# EAGLE board SX-Belegtmelder V01.00 (EAGLE 7.2.0)
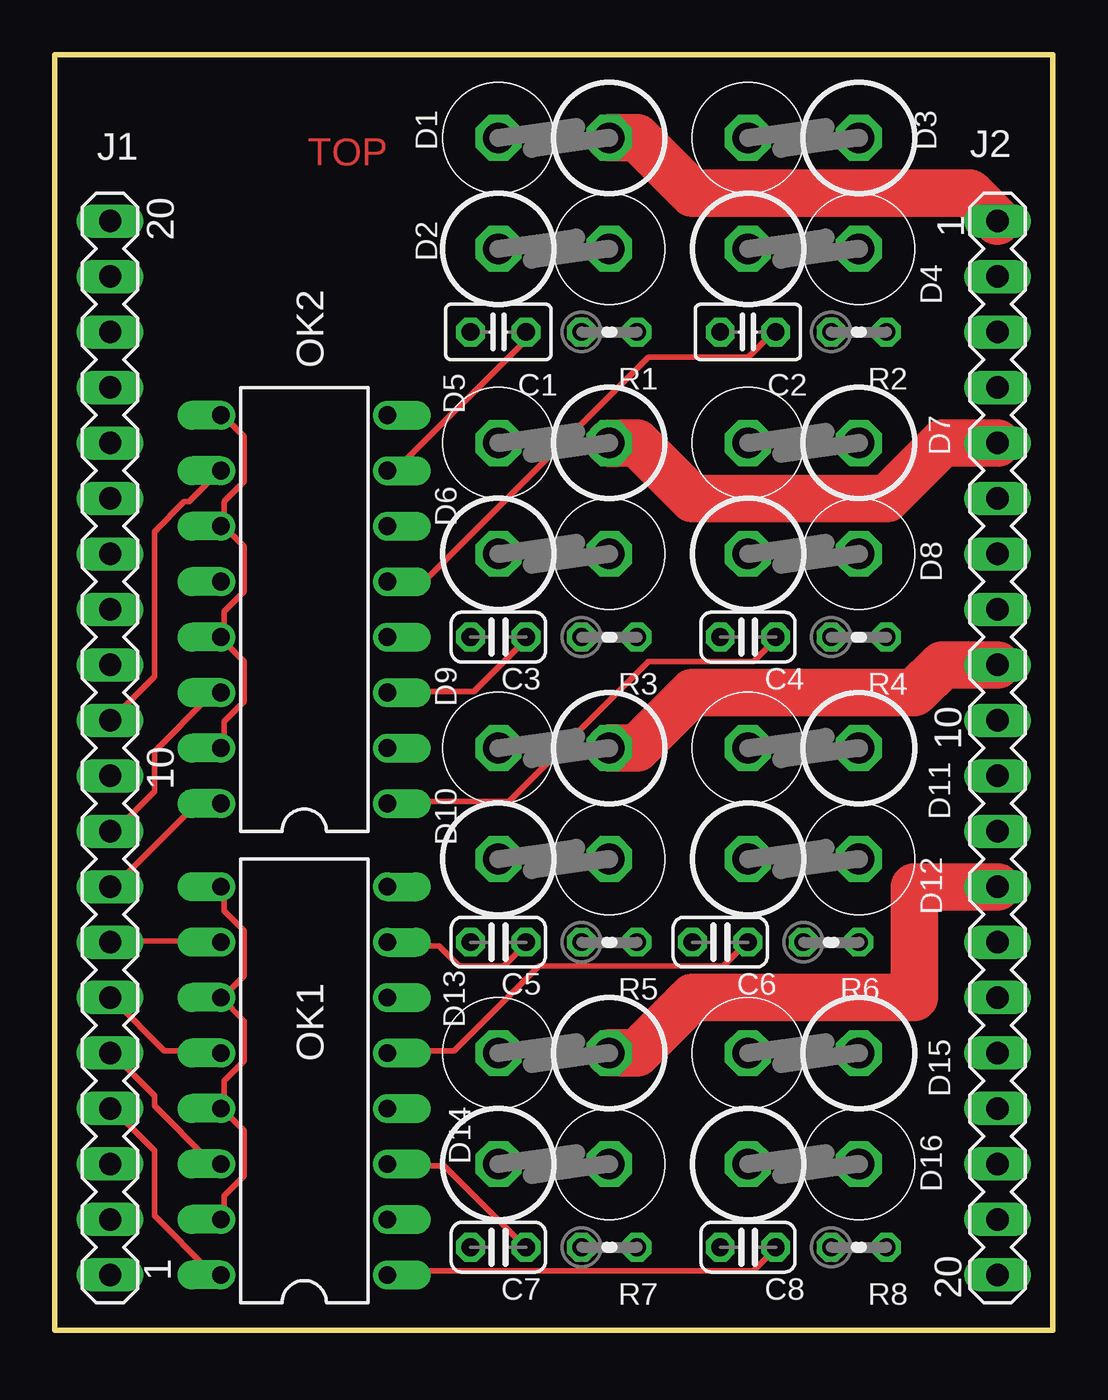
[diagram p0: board, top side]
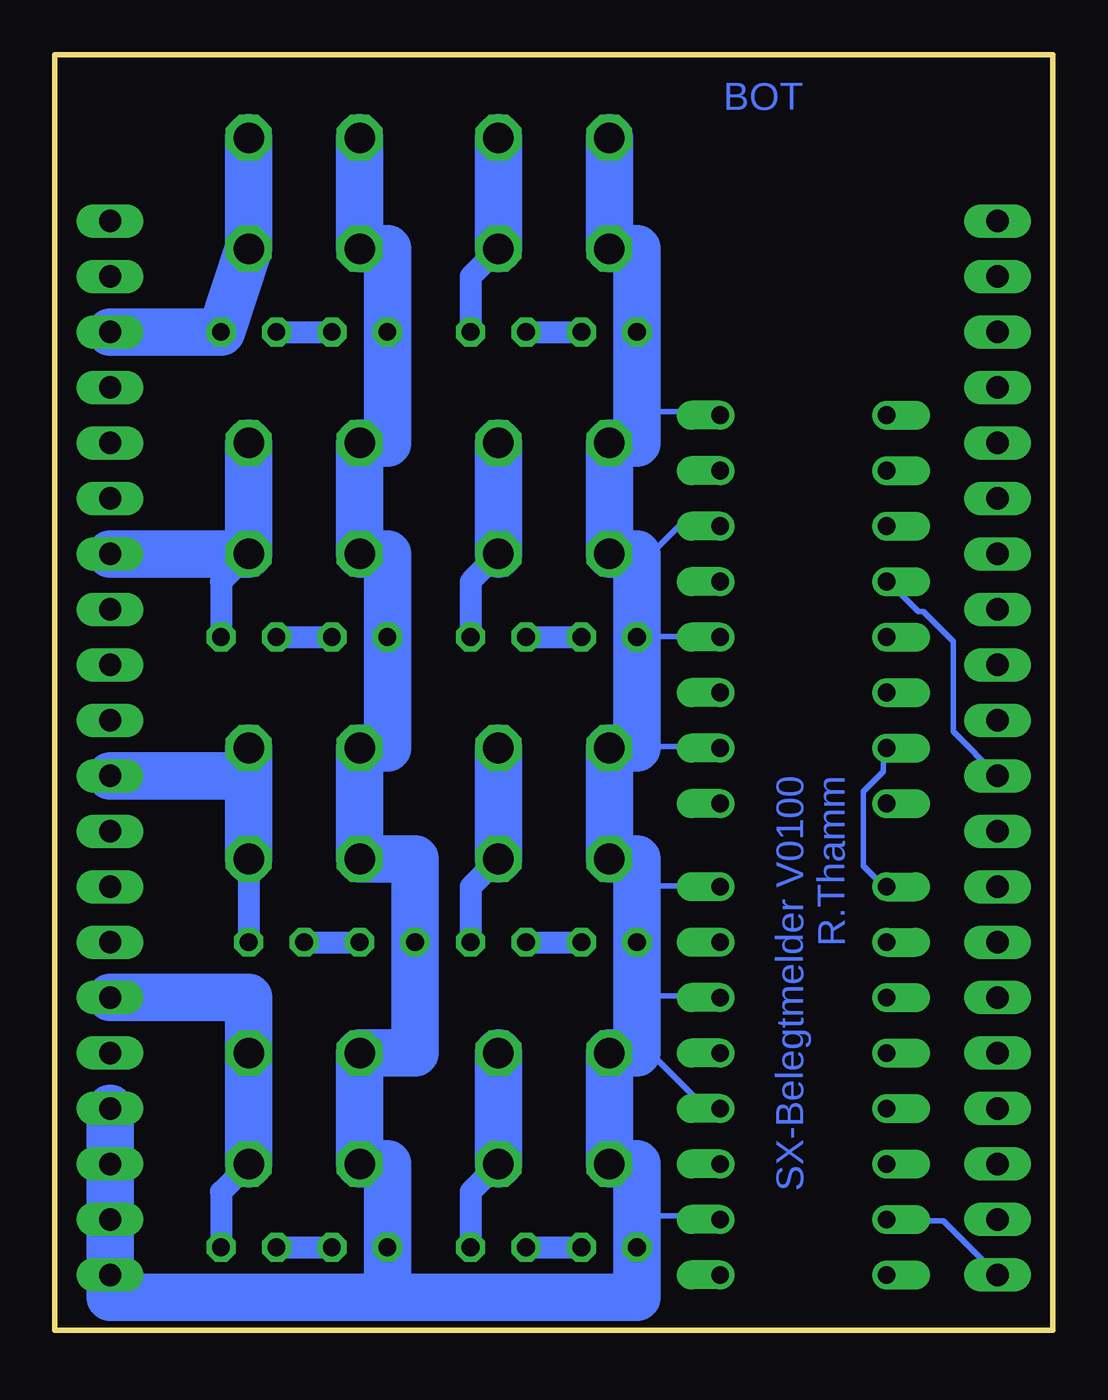
[diagram p1: board, bottom side, seen from below]

Size 45.72 x 58.42 mm. Coordinates in mm from the lower left corner, seen from the top.
Outline: 0,0 45.72,0 45.72,58.42 0,58.42 0,0
Copper layers (1*16): Top 0.035mm / dielectric 1.5mm / Bottom 0.035mm
Design rules "Elecrow_2-layer_eagle_rule": minimum track width 6mil, minimum drill 12mil, track to track 6mil, track to pad 6mil, pad to pad 6mil, via to via 6mil, smd to smd 0mil, copper to edge 10mil, drill to drill 10mil, minimum pad ring 10mil, minimum via ring 6mil, stop-mask expansion 2mil, vias tented up to drill 100mil, thermal gap 10mil

## Footprints (pad centres in the part's own frame; a part is rotated, then mirrored left to right if it is on the bottom)
C025-025X050 = drill 0.813 octagon: 1 -1.27,0; 2 1.27,0
C025-024X044 = drill 0.813 octagon: 1 -1.27,0; 2 1.27,0
TWIN-DIODE = drill 1.4 octagon: A -2.54,0; C 2.54,0
MA20-1 = drill 1.016 long: 1 -24.13,0; 2 -21.59,0; 3 -19.05,0; 4 -16.51,0; 5 -13.97,0; 6 -11.43,0; 7 -8.89,0; 8 -6.35,0; 9 -3.81,0; 10 -1.27,0; 11 1.27,0; 12 3.81,0; 13 6.35,0; 14 8.89,0; 15 11.43,0; 16 13.97,0; 17 16.51,0; 18 19.05,0; 19 21.59,0; 20 24.13,0
DIL16 = drill 0.813 offset: 1 -8.89,-3.81; 2 -6.35,-3.81; 3 -3.81,-3.81; 4 -1.27,-3.81; 5 1.27,-3.81; 6 3.81,-3.81; 7 6.35,-3.81; 8 8.89,-3.81; 9 8.89,3.81; 10 6.35,3.81; 11 3.81,3.81; 12 1.27,3.81; 13 -1.27,3.81; 14 -3.81,3.81; 15 -6.35,3.81; 16 -8.89,3.81
0204V = drill 0.813 octagon: 1 -1.27,0; 2 1.27,0

## Placement (x,y rotation side)
C1  100n  [C025-025X050]  20.32,45.72 0 top
C2  100n  [C025-025X050]  31.75,45.72 0 top
C3  100n  [C025-024X044]  20.32,31.75 0 top
C4  100n  [C025-024X044]  31.75,31.75 0 top
C5  100n  [C025-024X044]  20.32,17.78 0 top
C6  100n  [C025-024X044]  30.48,17.78 0 top
C7  100n  [C025-024X044]  20.32,3.81 0 top
C8  100n  [C025-024X044]  31.75,3.81 0 top
D1  2*1N5405  [TWIN-DIODE]  22.86,54.61 180 top
D2  2*1N5405  [TWIN-DIODE]  22.86,49.53 0 top
D3  2*1N5405  [TWIN-DIODE]  34.29,54.61 180 top
D4  2*1N5405  [TWIN-DIODE]  34.29,49.53 0 top
D5  2*1N5405  [TWIN-DIODE]  22.86,40.64 180 top
D6  2*1N5405  [TWIN-DIODE]  22.86,35.56 0 top
D7  2*1N5405  [TWIN-DIODE]  34.29,40.64 180 top
D8  2*1N5405  [TWIN-DIODE]  34.29,35.56 0 top
D9  2*1N5405  [TWIN-DIODE]  22.86,26.67 180 top
D10  2*1N5405  [TWIN-DIODE]  22.86,21.59 0 top
D11  2*1N5405  [TWIN-DIODE]  34.29,26.67 180 top
D12  2*1N5405  [TWIN-DIODE]  34.29,21.59 0 top
D13  2*1N5405  [TWIN-DIODE]  22.86,12.7 180 top
D14  2*1N5405  [TWIN-DIODE]  22.86,7.62 0 top
D15  2*1N5405  [TWIN-DIODE]  34.29,12.7 180 top
D16  2*1N5405  [TWIN-DIODE]  34.29,7.62 0 top
J1  [MA20-1]  2.54,26.67 90 top
J2  [MA20-1]  43.18,26.67 270 top
OK1  LTV844  [DIL16]  11.43,11.43 90 top
OK2  LTV844  [DIL16]  11.43,33.02 90 top
R1  33  [0204V]  25.4,45.72 0 top
R2  33  [0204V]  36.83,45.72 0 top
R3  33  [0204V]  25.4,31.75 0 top
R4  33  [0204V]  36.83,31.75 0 top
R5  33  [0204V]  25.4,17.78 0 top
R6  33  [0204V]  35.56,17.78 0 top
R7  33  [0204V]  25.4,3.81 0 top
R8  33  [0204V]  36.83,3.81 0 top

## Library data of the parts
C1-C8 R1-R8 = rcl
D1-D16 = diode-twin_Tha
J1 J2 = con-lstb; OC_FARNELL: unknown; OC_NEWARK: unknown
OK1 OK2 = optocoupler; MF: VISHAY/TELEFUNKEN; MPN: ILQ620; OC_FARNELL: 1612470; OC_NEWARK: 58K1694

## Nets
N$1: D1.A D2.C J2.1 R1.2
N$2: D3.A D4.C J2.3 R2.2
N$3: D5.A D6.C J2.5 R3.2
N$4: D7.A D8.C J2.7 R4.2
N$5: D9.A D10.C J2.9 R5.2
N$6: D11.A D12.C J2.11 R6.2
N$7: D13.A D14.C J2.13 R7.2
N$8: D15.A D16.C J2.15 R8.2
N$9: C1.1 C2.1 C3.1 C4.1 C5.1 C6.1 C7.1 C8.1 D1.C D2.A D3.C D4.A D5.C D6.A D7.C D8.A D9.C D10.A D11.C D12.A D13.C D14.A D15.C D16.A J2.17 J2.18 J2.19 J2.20 OK1.2 OK1.4 OK1.6 OK1.8 OK2.2 OK2.4 OK2.6 OK2.8
N$10: J1.4 OK1.16
N$11: J1.5 OK1.14
N$12: J1.6 OK1.12
N$13: J1.7 OK1.10
N$14: J1.8 OK2.16
N$15: J1.9 OK2.14
N$16: J1.10 OK2.12
N$17: C1.2 OK2.7 R1.1
N$18: C2.2 OK2.5 R2.1
N$19: C3.2 OK2.3 R3.1
N$20: C4.2 OK2.1 R4.1
N$21: C5.2 OK1.7 R5.1
N$22: C6.2 OK1.5 R6.1
N$23: C7.2 OK1.3 R7.1
N$24: C8.2 OK1.1 R8.1
N$25: J1.11 OK2.10
N$34: J1.1 OK1.9 OK1.11 OK1.13 OK1.15 OK2.9 OK2.11 OK2.13 OK2.15

## Tracks (layer width: path | path; a pad name or v marks a point on that pad's centre or on a via)
N$1
  Top 2.184: J2.1 41.91,52.07 29.21,52.07 26.67,54.61 D1.A
  Bottom 1.016: D2.C 26.67,48.26 R1.2
  Bottom 2.184: D2.C D1.A
N$2
  Bottom 2.184: D3.A D4.C R2.2 J2.3
N$3
  Top 2.184: J2.5 40.64,40.64 38.1,38.1 29.21,38.1 26.67,40.64 D5.A
  Bottom 1.016: D6.C 26.67,34.29 R3.2
  Bottom 2.184: D6.C D5.A
N$4
  Bottom 1.016: D8.C 38.1,34.29 R4.2
  Bottom 2.184: D7.A D8.C J2.7
N$5
  Top 2.184: J2.9 40.64,30.48 39.37,29.21 29.21,29.21 26.67,26.67 D9.A
  Bottom 1.016: D10.C 26.67,20.32 R5.2
  Bottom 2.184: D9.A D10.C
N$6
  Bottom 1.016: D12.C R6.2
  Bottom 2.184: D12.C D11.A 36.83,25.4 J2.11
N$7
  Top 2.184: J2.13 39.37,20.32 39.37,15.24 29.21,15.24 26.67,12.7 D13.A
  Bottom 1.016: D14.C 26.67,6.35 R7.2
  Bottom 2.184: D13.A D14.C
N$8
  Bottom 1.016: D16.C 38.1,6.35 R8.2
  Bottom 2.184: D16.C D15.A 36.83,15.24 J2.15
N$9
  Bottom 0.254: 19.05,5.26 15.32,5.26 OK1.2 | OK1.4 15.32,10.29 16,10.29 18.06,12.34 19.05,12.7 | 19.05,15.32 15.32,15.32 OK1.6 | 19.05,20.34 15.32,20.34 OK1.8 | OK2.2 15.32,26.75 18.06,26.75 19.05,26.67 | OK2.4 15.32,31.77 18.06,31.77 C3.1 | OK2.6 15.32,36.8 17.14,36.8 18.06,35.89 19.05,35.56 | 19.05,42.06 15.32,42.06 OK2.8
  Bottom 2.184: D3.C D4.A 30.48,49.53 C2.1 30.48,40.64 D7.C D8.A 30.48,35.56 C4.1 30.48,26.67 D11.C D12.A 29.21,21.59 C6.1 29.21,12.7 D15.C D16.A 30.48,7.62 C8.1 30.48,1.52 | D1.C D2.A 19.05,49.53 C1.1 19.05,42.06 19.05,40.64 D5.C D6.A 19.05,35.56 C3.1 19.05,26.67 D9.C D10.A 19.05,21.59 19.05,20.34 C5.1 19.05,15.32 19.05,12.7 D13.C D14.A 19.05,7.62 19.05,5.26 C7.1 19.05,1.52 30.48,1.52 | J2.17 J2.18 | J2.18 J2.19 J2.20 | J2.18 43.18,1.52 30.48,1.52
N$10
  Top 0.254: OK1.16 7.54,2.74 7.09,2.74 4.57,5.26 4.57,8.23 2.74,10.06 J1.4
N$11
  Top 0.254: OK1.14 7.54,7.77 7.09,7.77 4.57,10.29 4.57,10.74 2.74,12.57 J1.5
N$12
  Top 0.254: OK1.12 7.54,12.8 5.03,12.8 2.74,15.09 J1.6
N$13
  Top 0.254: OK1.10 7.54,17.83 2.74,17.83 J1.7
N$14
  Top 0.254: OK2.16 7.54,24 6.4,24 2.74,20.34 J1.8
N$15
  Top 0.254: OK2.14 7.54,29.03 7.09,29.03 4.57,26.52 4.57,24.69 2.74,22.86 J1.9
N$16
  Bottom 0.254: J1.10 4.57,27.43 4.57,31.55 5.94,32.92 6.17,32.92 7.54,34.29 OK2.12
N$17
  Top 0.254: OK2.7 15.32,39.55 15.77,39.55 21.49,45.26 21.49,45.72 C1.2
  Bottom 1.016: R1.1 C1.2
N$18
  Top 0.254: OK2.5 16.92,34.29 27.2,44.58 31.77,44.58 32.92,45.72 C2.2
  Bottom 1.016: R2.1 C2.2
N$19
  Top 0.254: OK2.3 15.32,29.26 19.2,29.26 21.49,31.55 C3.2
  Bottom 1.016: R3.1 C3.2
N$20
  Top 0.254: OK2.1 15.32,24.23 20.8,24.23 27.2,30.63 32,30.63 32.92,31.55 C4.2
  Bottom 1.016: R4.1 C4.2
N$21
  Top 0.254: OK1.7 15.32,17.6 17.6,17.6 18.52,16.69 20.57,16.69 21.49,17.6 C5.2
  Bottom 1.016: R5.1 C5.2
N$22
  Top 0.254: OK1.5 15.32,12.8 18.29,12.8 22.17,16.69 30.63,16.69 31.55,17.6 C6.2
  Bottom 1.016: R6.1 C6.2
N$23
  Top 0.254: OK1.3 15.32,7.54 17.83,7.54 21.49,3.89 C7.2
  Bottom 1.016: R7.1 C7.2
N$24
  Top 0.254: OK1.1 15.32,2.74 32,2.74 32.92,3.66 C8.2
  Bottom 1.016: R8.1 C8.2
N$25
  Top 0.254: OK2.10 7.54,39.32 6.17,37.95 5.94,37.95 4.57,36.58 4.57,29.95 2.74,28.12 J1.11
N$34
  Top 0.254: OK2.15 7.77,26.75 7.77,27.89 8.69,28.8 8.69,30.63 7.77,31.55 OK2.13 7.77,31.77 7.77,32.92 8.69,33.83 8.69,35.89 7.77,36.8 OK2.11 7.77,37.03 7.77,37.95 8.69,38.86 8.69,40.92 7.77,41.83 OK2.9 | OK1.9 7.77,20.12 7.77,19.2 8.69,18.29 8.69,16.23 7.77,15.32 OK1.11 8.69,14.17 8.69,12.34 7.77,11.43 7.77,10.29 OK1.13 7.77,10.06 8.69,9.14 8.69,7.09 7.77,6.17 7.77,5.26 OK1.15
  Bottom 0.254: J1.1 5.03,5.03 7.54,5.03 OK1.15 | OK2.15 7.77,26.52 7.77,25.6 8.69,24.69 8.69,21.26 7.77,20.34 OK1.9

## Text on the board
Top: TOP
Bottom: BOT | SX-Belegtmelder V0100 / R.Thamm